# Altium PCB JLink_ARM-OB_Pcb.PcbDoc
Units mil, origin at the board's own origin, x right, y up, seen from the top; angles counter-clockwise.
Board outline 944.88 x 472.44 mil, 2 copper layers (Top Layer, Bottom Layer); 31 components, 27 nets, 123 pads, 58 vias.
Unrouted connection lines stored in the file: 1.
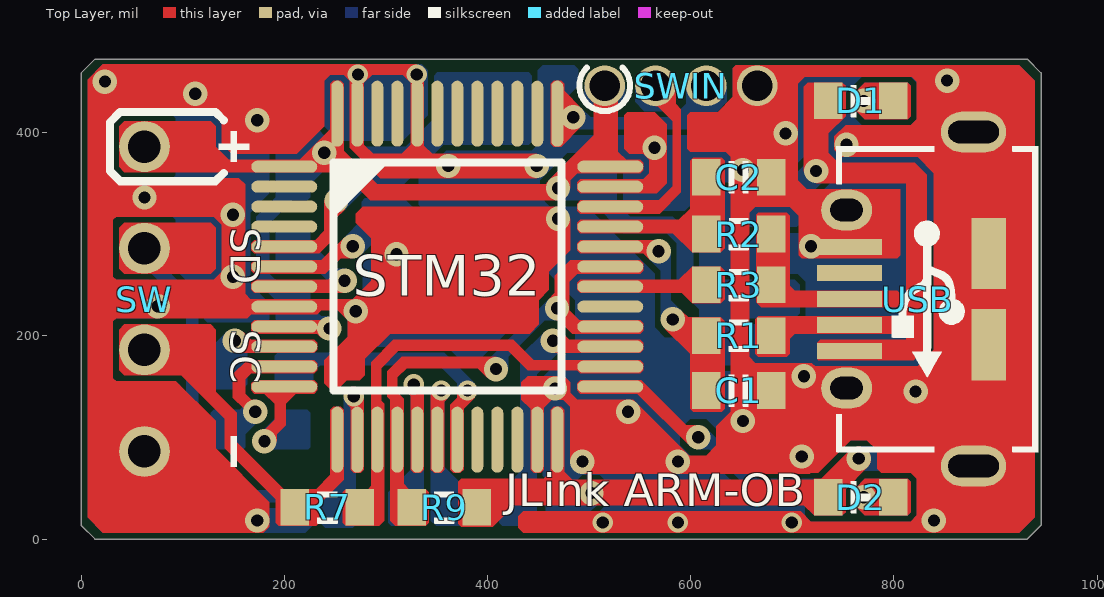
[diagram p0: Top Layer view]
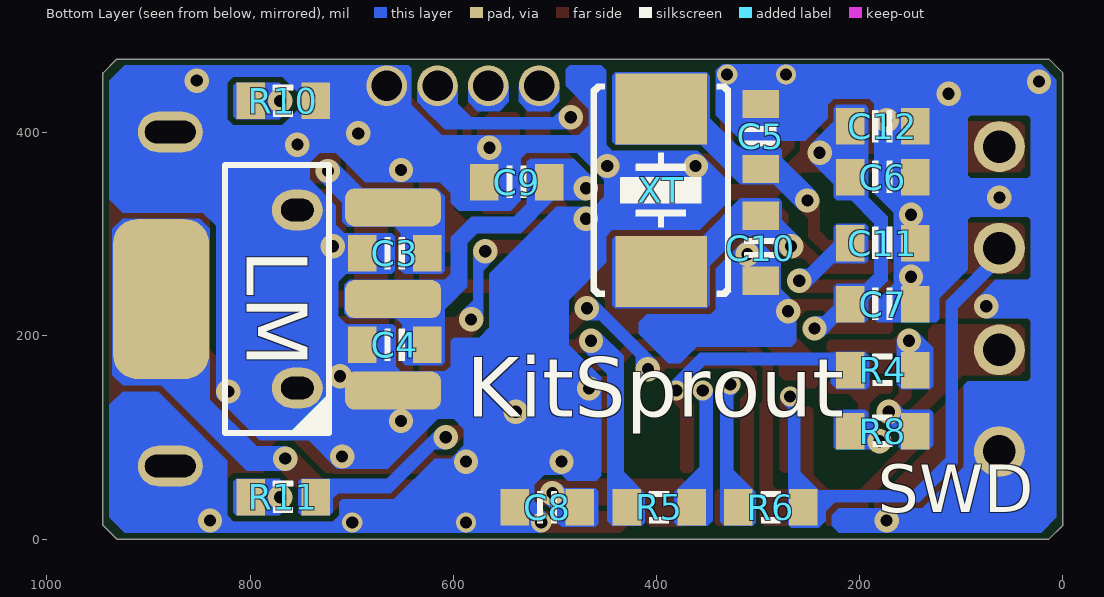
[diagram p1: Bottom Layer view, seen from below]
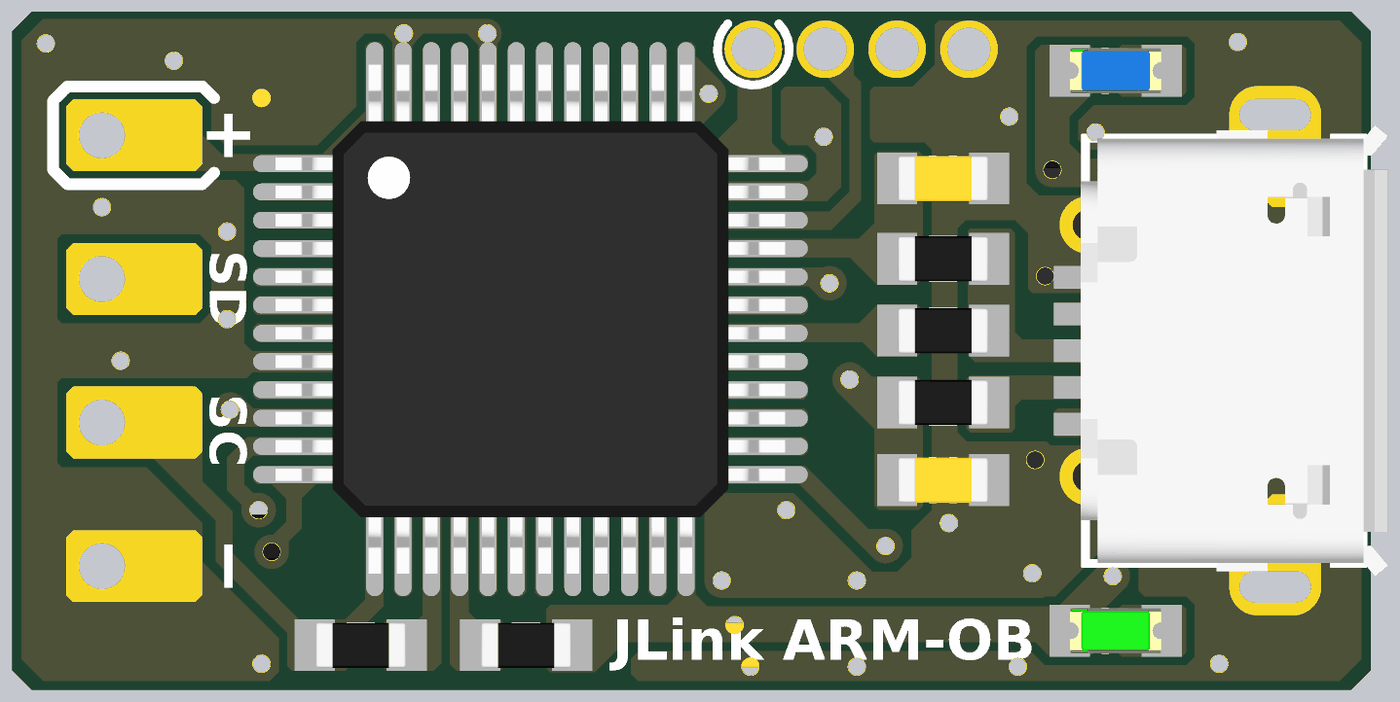
[diagram p2: 3D render of the assembled board from above, using the file's embedded part models]
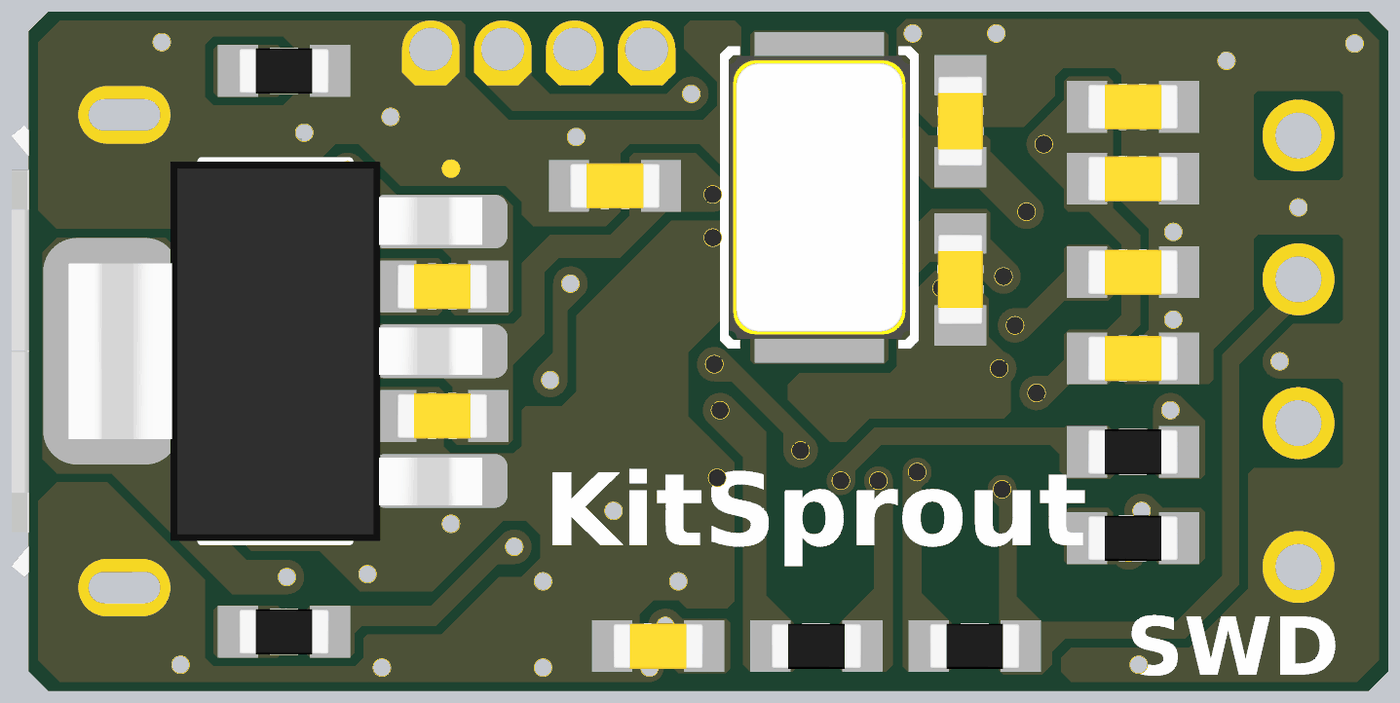
[diagram p3: 3D render of the assembled board from below, using the file's embedded part models]

## Layer stack, top to bottom
Top Solder: solder mask 0.4, Solder Resist, Dk 3.5
Top Layer: signal copper 1.4
Dielectric1: dielectric 12.6, FR-4, Dk 4.8
Bottom Layer: signal copper 1.4
Bottom Solder: solder mask 0.4, Solder Resist, Dk 3.5

## Board outline
0,13.66 13.66,0 931.22,0 944.88,13.66 944.88,458.78 931.22,472.44 13.66,472.44 0,458.78

## Design rules (kind name [scope] priority, off if disabled: settings)
Clearance ClearancePolygon [InPolygon] p1: gap=12 ignorepadtopadclearanceinfootprint=FALSE except(0: Arc-Hole Track-Hole SMDPad-Hole THPad-Hole Via-Hole Fill-Hole Poly-Hole Region-Hole Text-Hole)
Clearance [All] p2: gap=6 ignorepadtopadclearanceinfootprint=FALSE except(0: Arc-Hole Track-Hole SMDPad-Hole THPad-Hole Via-Hole Fill-Hole Poly-Hole Region-Hole Text-Hole)
ComponentClearance [All] p1: gap=0 collisioncheckmode=3 verticalgap=0 showdistances=FALSE
HoleToHoleClearance [All] p1: gap=0 allowstackedmicrovias=TRUE
MinimumSolderMaskSliver [All] p1: minsoldermaskwidth=0
PlaneConnect [All] p1: planeconnectstyle=Direct reliefexpansion=20 reliefentries=4 reliefconductorwidth=20 reliefairgap=10
PolygonConnect [All] p1: connectstyle=Direct reliefconductorwidth=20 reliefentries=4 polygonreliefangle="90 Angle" airgapwidth=10
RoutingVias [All] p1: holewidth=12 width=20 viastyle="Through Hole" minholewidth=12 minwidth=20 maxholewidth=20 maxwidth=50
SilkToSilkClearance [All] p1: silktosilkclearance=0
SilkToSolderMaskClearance SilkscreenOverComponentPads [IsPad] p1: minsilkscreentomaskgap=2 clearancetoexposedcopper=TRUE
SolderMaskExpansion [All] p1: expansion=0 istentingtop=FALSE
Width [All] p1: maxlimit=35 minlimit=6 preferedwidth=10
24 further rules are at their usual default settings.

## Components (designator, comment, footprint, x,y, rotation, side; value= is the part's Value field where it differs from the comment)
C1 "Cap_0603" CAP_0603 647.44,146.22 r180 top locked
C2 "Cap_0603" CAP_0603 647.44,356.22 r180 top locked
C3 "Cap_0603" CAP_0603 657.44,281.22 r180 bottom locked
C4 "Cap_0603" CAP_0603 657.44,191.22 r180 bottom locked
C5 "Cap_0603" CAP_0603 297.44,396.22 r90 bottom locked
C6 "Cap_0603" CAP_0603 177.44,356.22 r180 bottom locked
C7 "Cap_0603" CAP_0603 177.44,231.22 r180 bottom locked
C8 "Cap_0603" CAP_0603 507.44,31.22 r0 bottom locked
C9 "Cap_0603" CAP_0603 537.44,351.22 r0 bottom locked
C10 "Cap_0603" CAP_0603 297.44,286.22 r270 bottom locked
C11 "Cap_0603" CAP_0603 177.44,291.22 r180 bottom locked
C12 "Cap_0603" CAP_0603 177.44,406.22 r180 bottom locked
D1 "LED_0603" LED_0603_BLUE 767.44,431.22 r0 top locked
D2 "LED_0603" LED_0603_GREEN 767.44,41.22 r0 top locked
LM "AMS1117" SOT223 773.44,236.22 r90 bottom locked
R1 "Res_0603" RES_0603 647.44,200.22 r180 top locked
R2 "Res_0603" RES_0603 647.44,300.22 r180 top locked
R3 "Res_0603" RES_0603 647.44,250.22 r180 top locked
R4 "Res_0603" RES_0603 177.44,166.22 r180 bottom locked
R5 "Res_0603" RES_0603 397.44,31.22 r0 bottom locked
R6 "Res_0603" RES_0603 287.44,31.22 r0 bottom locked
R7 "Res_0603" RES_0603 242.44,31.22 r0 top locked
R8 "Res_0603" RES_0603 177.44,106.22 r180 bottom locked
R9 "Res_0603" RES_0603 357.44,31.22 r0 top locked
R10 "Res_0603" RES_0603 767.44,431.22 r0 bottom locked
R11 "Res_0603" RES_0603 767.44,41.22 r0 bottom locked
STM32 "STM32F103C" STM32_QFP48 360.44,258.22 r0 top locked
SW "HDR1X4_90_2.54" HDR1X4_90_2.54 62.44,86.22 r90 top
SWIN "Pad1X4_1.27_SWD" Pad1X4_1.27 515.44,446.22 r0 top locked
USB "USB_Micro" USB_Micro-AB 881.44,236.22 r270 top locked
XT "XTAL_5032_2P" XT_5032_2 395.44,343.22 r90 bottom locked

## Footprints (in the part's own frame and the unit in brackets; to place one, negate y for a bottom-side part, rotate by r counter-clockwise, add the part's x,y. Pads: shape width x height; smd on the part's side, far side on the other; paste and mask are expansions set on the pad)
CAP_0603 [mil]
  rect 28x36 smd: 1(-32,0) 2(32,0)
  silkscreen extent -10,-16 10,16, body extent -31,-16 32,16, height 36
HDR1X4_90_2.54 [mil] "Connector; Header; 4 Position"
  round 50 hole 32: 1(0,0) 2(100,0) 3(200,0) 4(300,0)
LED_0603_BLUE [mil]
  rect 28x36 smd: 1(-32,0) 2(32,0)
  silkscreen extent -10,-16 10,16, body extent -32,-16 32,16, height 24
LED_0603_GREEN [mil]
  rect 28x36 smd: 1(-32,0) 2(32,0)
  silkscreen extent -10,-16 10,16, body extent -32,-16 32,16, height 24
Pad1X4_1.27 [mil] "Connector; Header; 2 Position"
  round 40 hole 30 mask+0: 1(0,0) 2(50,0) 3(100,0) 4(150,0)
  Bottom Layer region: 130,0 130,-16 139,-25 161,-25 170,-16 170,0
  Bottom Layer region: 80,0 80,-16 89,-25 111,-25 120,-16 120,0
  Bottom Layer region: 30,0 30,-16 39,-25 61,-25 70,-16 70,0
  Bottom Layer region: -20,0 -20,-16 -11,-25 11,-25 20,-16 20,0
RES_0603 [mil]
  rect 28x36 smd: 1(-32,0) 2(32,0)
  silkscreen extent -10,-16 10,16, body extent -31,-16 32,16, height 20
SOT223 [mm] "SOT223, 4-Leads, Body 6.7x7.3mm (max), Pitch 2.29mm, IPC Medium Density"
  rrect50% 0.95x2.4 smd: 1(-2.29,-2.9) 2(0,-2.9) 3(2.29,-2.9)
  rrect50% 4x2.4 smd: 4(0,2.9)
  silkscreen extent -3.35,-1.3 3.35,1.3, body extent -3.35,-3.65 3.35,3.65, height 1.8
STM32_QFP48 [mm] "TSQFP, 48-Leads, Body 9.0x9.0mm (max), Pitch 0.50mm, IPC Medium Density"
  oval 1.65x0.3 smd: 1(-4.075,2.75) 2(-4.075,2.25) 3(-4.075,1.75) 4(-4.075,1.25) 5(-4.075,0.75) 6(-4.075,0.25) 7(-4.075,-0.25) 8(-4.075,-0.75) 9(-4.075,-1.25) 10(-4.075,-1.75) 11(-4.075,-2.25) 12(-4.075,-2.75) 25(4.075,-2.75) 26(4.075,-2.25) 27(4.075,-1.75) 28(4.075,-1.25) 29(4.075,-0.75) 30(4.075,-0.25) 31(4.075,0.25) 32(4.075,0.75) 33(4.075,1.25) 34(4.075,1.75) 35(4.075,2.25) 36(4.075,2.75)
  oval 0.3x1.65 smd: 13(-2.75,-4.075) 14(-2.25,-4.075) 15(-1.75,-4.075) 16(-1.25,-4.075) 17(-0.75,-4.075) 18(-0.25,-4.075) 19(0.25,-4.075) 20(0.75,-4.075) 21(1.25,-4.075) 22(1.75,-4.075) 23(2.25,-4.075) 24(2.75,-4.075) 37(2.75,4.075) 38(2.25,4.075) 39(1.75,4.075) 40(1.25,4.075) 41(0.75,4.075) 42(0.25,4.075) 43(-0.25,4.075) 44(-0.75,4.075) 45(-1.25,4.075) 46(-1.75,4.075) 47(-2.25,4.075) 48(-2.75,4.075)
  silkscreen extent -2.85,-2.85 2.85,2.85, body extent -4.5,-4.5 4.5,4.5, height 1.59
USB_Micro-AB [mil]
  rect 15.75x64 smd: 1(51.18,-125) 2(25.59,-125) 3(0,-125) 4(-25.59,-125) 5(-51.18,-125)
  oval 40x64 hole 22 slot 50 at 90 deg mask+0: 5(-164.37,-3) 5(164.37,-3)
  oval 40x50 hole 22 slot 32 at 90 deg mask+0: 5(-87.6,-128) 5(87.6,-128)
  rect 70x34 smd mask+0: 5(-45,12) 5(45,12)
  Top Layer region: -164.37,29 -100,29 -100,-5 -130,-35 -164.37,-35
  Top Layer region: 100,29 164.37,29 164.37,-35 130,-35 100,-5
  silkscreen extent -150,-138 151,61, body extent -157,-138 157,75, height 107
XT_5032_2 [mil]
  rect 70x90 smd: 1(-80,0) 2(80,0)
  silkscreen extent -104,-68 104,68, body extent -98,-63 98,63, height 39

## Part data
C1 C2 C3 C4 C5 C6 C7 C8 C9 C10 C11 C12: "Capacitor"
D1 D2: "LED"
LM: "Power"
R1 R2 R3 R4 R5 R6 R7 R8 R9 R10 R11: "Resistor"
STM32: "MCU"
SW SWIN: "Header"
USB: "USB"
XT: "Crystal Oscillator"

## Via types
v1: diameter 24, hole 12, Top Layer to Bottom Layer, 49 vias
v2: diameter 20, hole 12, Top Layer to Bottom Layer, 9 vias

## Nets (pads, with @x,y where several pads share a name; then routed paths per layer and width w, separated by ;. In a path a pad name is that pad's centre, name@x,y a point inside that pad or via, vN(x,y) a via of type N, cw(c..) or ccw(c..) an arc to the next point about the centre after c; other vN are vias at no path point)
3V3: C4.2 C6.1 C7.1 C8.1 C9.1 C12.1 D2.1 LM.2 LM.4 R9.2 STM32.1 STM32.9 STM32.24 STM32.36 STM32.48 SW.4 SWIN.1 | length 1938.6
  Top Layer w10: SW.4 82.17,366.49 STM32.1 225.71,366.49 v1(239.44,380.22) ; STM32.9 242.65,209.01 v1(244.44,207.22) ; 252.17,379.95 STM32.48 ; R9.2@389.91,29.22 405.91,45.22 729.98,45.22 D2.1@733.98,41.22 ; v1(469.44,345.22) 469.44,353.72 482.99,367.27 520.32,367.27 509.44,378.14
  Top Layer w16: 252.44,377.22 288.44,341.22 v1@469.44,341.22
  Top Layer w24: 516.44,378.14 SWIN.1@516.44,446.22 ; D2.1@730.44,44.22 v1(765.44,79.22)
  Bottom Layer w10: 180.44,311.76 180.44,257.22 203.44,234.22 213.44,234.22 240.44,207.22 v1(244.44,207.22) ; 180.44,312.76 209.91,342.22 209.91,350.22 239.44,379.76 v1(239.44,380.22) 239.44,380.69 C12.1@209.91,410.22 ; v1@465.44,342.22 477.44,354.22 C9.1@505.91,354.22 ; C9.1@506.98,354.22 C9.1@505.91,354.22 ; LM.2@620.44,232.22 595.44,257.22 595.44,291.22 575.44,311.22 538.44,311.22 505.91,343.76 C9.1@505.91,354.22 ; LM.2@620.44,236.22 LM.2 630.44,236.22 629.98,235.76 C4.2@629.98,191.22 ; LM.4@887.62,168.39 LM.4 LM.4@887.62,267.05
  Bottom Layer w24: v1(765.44,79.22) 798.44,79.22 LM.4@887.62,168.39
  other v1: 502.44,45.22
D+: C2.2 R2.2 STM32.33 | length 148.7
  Top Layer w10: STM32.33@520.32,308.21 R2.2@614.98,308.21 ; R2.2@614.98,304.22 R2.2@614.98,308.21 ; C2.2@614.98,358.22 R2.2@614.98,308.21
D-: C1.2 R1.2 STM32.32 | length 206.9
  Top Layer w10: STM32.32@520.32,288.53 v1@562.13,288.53 ; v1@585.44,216.22 605.44,196.22 614.98,196.22 C1.2@614.98,142.22
  Bottom Layer w10: v1(568.44,283.22) 575.44,276.22 575.44,224.22 v1@583.44,216.22
  other v1: 582.44,216.22
GND: C1.1 C2.1 C3.1 C4.1 C5.2 C6.2 C7.2 C8.2 C9.2 C10.2 C11.2 C12.2 LM.1 R10.1 STM32.8 STM32.23 STM32.35 STM32.44 STM32.47 SW.1 SWIN.4 USB.5 | length 3085.6
  Top Layer w8: v1@473,145.22 493.44,124.78 v1@493.44,75.22
  Top Layer w10: SW.1@52.44,86.22 52.44,96.22 12.44,136.22 12.44,438.22 v1(112.44,438.22) ; v1@117.44,438.22 141.44,462.22 v2@270.44,462.22 ; v1@147.44,261.22 147.44,241.22 159.97,228.69 STM32.8 201.54,230.22 290.44,230.22 ; v2@271.44,461.22 271.44,419.07 STM32.47 ; v2@272.36,462.13 324.53,462.13 330.91,455.75 STM32.44 330.91,376.75 340.44,367.22 v1(448.44,367.22) ; STM32.23 449.02,135.8 458.44,145.22 v1@473,145.22
  Top Layer w12: USB.5@725.62,287.4 USB.5@781.13,287.4
  Top Layer w24: SWIN.4@665.44,442.22 665.44,374.69 C2.1@681.91,358.22 ; C1.1@681.91,142.22 699.44,142.22 ; v1(852.44,451.22) 867.44,436.22 867.44,414.59 881.44,400.59 896.44,385.59 896.44,281.22 896.44,191.22 896.44,86.85 USB.5@881.44,71.85
  Bottom Layer w10: v1(112.44,438.22) 142.98,407.69 C7.2@142.98,234.22 ; v2@271.44,461.22 273.94,458.72 v2@274.41,458.72 ; v2(272.44,457.22) 294.98,434.69 C5.2@298.44,434.69 ; v1(361.44,367.22) 366.44,362.22 443.44,362.22 469.44,388.22 611.44,388.22 SWIN.4@665.44,442.22 ; v1@493.44,75.22 520.44,75.22 538.44,57.22 C8.2@538.44,30.69
  Bottom Layer w24: SWIN.4 692.44,446.22 804.44,334.22 804.44,184.73 769.93,150.22 727.44,150.22 717.44,160.22 696.91,180.76 C4.1@696.91,191.22 ; C3.1@696.91,281.22 702.66,281.22 725.44,258.44 725.44,214.56 C4.1@702.1,191.22
  other v1: 173.44,18.22 839.44,18.22 493.44,76.22 587.44,76.22 709.44,81.22 651.44,116.22 538.44,125.22 821.44,145.22 466.44,148.22 711.44,160.22 270.44,224.22 75.44,229.22 149.44,258.22 310.44,280.22 718.44,288.22 469.44,315.22 149.44,319.22 62.44,336.22 651.44,363.22 564.44,385.22 753.44,388.22 693.44,399.22 173.44,412.22 23.44,450.22
  other v2: 513.44,16.22 587.44,16.22 699.44,16.22 330.44,457.22
JTCK: STM32.37 SWIN.3 | length 155.9
  Top Layer w10: STM32.37@468.15,419.43 474.36,413.22 v1@486.44,413.22
  Bottom Layer w8: 494.44,408.22 581.44,408.22 SWIN.3@615.44,442.22
  other v1: 484.44,415.22
JTMS: STM32.34 SWIN.2 | length 179
  Top Layer w8: STM32.34@520.32,327.9 569.12,327.9 586.44,345.22 586.44,414.22 565.44,435.22 SWIN.2@565.44,442.22
LED: R11.1 STM32.25 | length 261.2
  Top Layer w10: STM32.25@520.87,149.73 549.43,149.73 596.94,102.22 v1@611.44,102.22
  Bottom Layer w12: v1(607.44,100.22) 615.44,100.22 663.44,52.22 722.98,52.22 R11.1@733.98,41.22
NetD1_2: D1.2 R10.2
  other v1: 770.44,431.22
NetD2_2: D2.2 R11.2
  other v1: 770.44,41.22
NetR1_1: R1.1 USB.2 | length 95.5
  Top Layer w6: R1.1@681.91,196.22 696.32,210.63 USB.2@771.44,210.63
NetR2_1: R2.1 R3.1 USB.3 | length 95.3
  Top Layer w6: R3.1@681.91,250.22 695.91,236.22 USB.3@771.44,236.22
RD+: R3.2 STM32.30 | length 93.6
  Top Layer w10: STM32.30@520.32,249.16 R3.2@613.91,249.16
RST: C11.1 STM32.7 | length 125.5
  Top Layer w10: STM32.7 253.6,248.38 v1(259.44,254.22)
  Bottom Layer w10: C11.1@209.91,288.22 219.44,288.22 253.44,254.22 v1(259.44,254.22)
TCK_I: R7.1 STM32.13 SW.2 | length 339.3
  Top Layer w12: SW.2 115.44,186.22 126.44,175.22 126.44,142.22 147.44,121.22 147.44,92.22 208.67,30.99 221.75,30.99 252.17,61.42 STM32.13
TCK_O: R7.2 STM32.15 STM32.26 | length 350.2
  Top Layer w8: STM32.15 STM32.15@291.54,128.98
  Top Layer w10: STM32.15 291.54,133.12 290.44,134.22 290.44,170.22 310.44,190.22 423.44,190.22 442.44,171.22 STM32.26@520.44,171.22
TDI_I: R5.1 STM32.18 | length 105.1
  Bottom Layer w12: 350.44,42.76 350.44,142.22 v2(354.44,146.22)
TDI_O: R5.2 STM32.27 | length 236.3
  Top Layer w12: v1(464.44,195.22) v1@470.34,189.32 ; v1@469.91,189.22 STM32.27@520.44,189.22
  Bottom Layer w12: R5.2@429.91,29.22 R5.2@440.44,39.76 ; R5.2@441.44,39.76 441.44,178.22 v1@458.44,195.22
TDO_I: R9.1 STM32.16 STM32.28 STM32.31 | length 393.2
  Top Layer w10: 306.44,143.22 306.44,162.22 316.44,172.22 317.44,172.22 318.44,173.22 393.44,173.22 v1@399.44,167.22 ; 306.77,141.89 311.23,137.43 STM32.16
  Top Layer w12: STM32.28@520.32,208.79 485.88,208.79 473.44,221.22 473.44,255.22 486.06,267.84 STM32.31@520.32,267.84
  Bottom Layer w10: v1(408.44,167.22) 408.44,176.22 459.44,227.22 v1(468.44,227.22)
TMS_I: R6.1 STM32.14 SW.3 | length 390.9
  Bottom Layer w12: SW.3 62.44,277.22 109.44,230.22 109.44,77.22 144.44,42.22 238.98,42.22 R6.1@251.98,29.22
  other v2: 268.44,140.22
TMS_O: R6.2 STM32.17 | length 111.5
  Bottom Layer w12: R6.2@331.44,39.76 v2@331.44,151.22
  other v2: 327.44,152.22
TRES_I: R8.1 STM32.12 | length 96.9
  Top Layer w10: v1(180.44,96.22) 180.44,99.22 196.01,114.79 STM32.12@196.01,149.95
  Bottom Layer w10: v1@179.44,95.22 194.44,110.22 R8.1@209.91,110.22
TRES_O: R8.2 STM32.11 | length 127.2
  Top Layer w10: v1@171.94,124.72 156.44,140.22 156.44,162.22 163.86,169.64 STM32.11
  Bottom Layer w10: R8.2@142.98,110.22 158.44,110.22 v1@173.44,125.22
  other v1: 171.44,125.22
TRST_I: R4.1 STM32.19 | length 191.8
  Bottom Layer w12: R4.1@209.91,164.22 222.91,177.22 354.55,177.22 380.44,151.33 v2(380.44,146.22)
TRST_O: R4.2 STM32.10 | length 87.9
  Top Layer w12: v1@150.44,196.22 157.34,189.32 STM32.10
  Bottom Layer w12: R4.2@142.98,164.22 151.44,172.69 v1@151.44,196.22
  other v1: 151.44,195.22
VCC: C3.2 D1.1 LM.3 USB.1 | length 521.7
  Top Layer w15: v1@731.44,359.22 820.44,359.22 820.44,190.22 815.26,185.04 USB.1@781.13,185.04
  Top Layer w24: v1@723.44,367.22 723.44,420.69 D1.1@733.98,431.22
  Bottom Layer w24: C3.2@629.98,281.22 629.98,326.38 LM.3 LM.3@686.6,326.38 ; LM.3@686.6,325.38 v1(723.44,362.22)
X1: C5.1 STM32.5 XT.2 | length 155.8
  Top Layer w10: STM32.5 231.63,287.75 244.44,300.56 244.44,326.22 v1(251.44,333.22)
  Bottom Layer w10: v1@258.44,335.22 290.98,367.76 C5.1@298.44,367.76
  Bottom Layer w12: XT.2@378.44,426.22 XT.2@395.44,426.22
X2: C10.1 STM32.6 XT.1 | length 125.7
  Top Layer w10: STM32.6 238.28,268.06 v1@258.44,288.22
  Bottom Layer w10: v1@267.44,290.22 271.98,290.22 C10.1@298.44,316.69
  Bottom Layer w12: XT.1@378.44,260.22 XT.1@395.44,260.22
  other v1: 267.44,288.22
pads on no net: STM32.2 STM32.3 STM32.4 STM32.20 STM32.21 STM32.22 STM32.29 STM32.38 STM32.39 STM32.40 STM32.41 STM32.42 STM32.43 STM32.45 STM32.46 USB.4

## Other copper
Top Layer:
  region net TMS_O: 337.44,68.22 334.44,65.22 327.44,65.22 324.44,68.22 324.44,141.22 320.44,145.22 327.44,152.22 337.44,152.22
  region net TDI_I: 357.44,68.22 354.44,65.22 347.44,65.22 344.44,68.22 344.44,146.22 354.44,146.22 361.44,139.22 357.44,135.22
  region net NetD1_2: 813.44,449.22 816.44,446.22 816.44,416.22 813.44,413.22 771.44,413.22 761.94,422.72 770.44,431.22 761.94,439.72 771.44,449.22
  region net NetD2_2: 813.44,59.22 816.44,56.22 816.44,26.22 813.44,23.22 771.44,23.22 761.94,32.72 770.44,41.22 761.94,49.72 771.44,59.22
  region net NetR2_1: 803.44,244.22 806.44,241.22 806.44,231.22 803.44,228.22 669.44,228.22 664.44,233.22 664.44,319.22 666.44,321.22 694.44,321.22 697.44,318.22 697.44,249.22 702.44,244.22
  region net VCC: 735.44,380.22 735.44,399.22 752.44,416.22 752.44,446.22 749.44,449.22 715.44,449.22 711.44,445.22 711.44,362.22 723.44,362.22 723.44,350.22 812.44,350.22 812.44,196.22 727.44,196.22 724.44,193.22 724.44,177.22 725.44,176.22 819.73,176.22 832.44,188.94 832.44,358.5 820.73,370.22 745.44,370.22
  region net D-: 633.44,214.22 633.44,128.22 630.44,125.22 602.44,125.22 599.44,128.22 599.44,182.22 574.44,207.22 591.44,224.22 597.44,218.22 629.44,218.22
  region net RD+: 601.44,268.22 629.44,268.22 633.44,264.22 633.44,236.22 629.44,232.22 601.44,232.22 591.44,242.22 491.44,242.22 488.44,245.22 488.44,252.22 491.44,255.22 588.44,255.22
  region net D-: 568.44,294.22 568.44,283.22 559.94,274.72 553.44,281.22 491.44,281.22 488.44,284.22 488.44,291.22 491.44,294.22
  region net D+: 588.44,314.22 599.44,325.22 599.44,372.22 602.44,375.22 630.44,375.22 633.44,372.22 633.44,286.22 629.44,282.22 601.44,282.22 582.44,301.22 491.44,301.22 488.44,304.22 488.44,311.22 491.44,314.22
  region net JTMS: 568.44,333.22 582.44,347.22 582.44,411.22 567.44,426.22 565.44,426.22 565.44,446.22 585.44,446.22 585.44,428.22 590.44,423.22 590.44,341.22 569.44,320.22 491.44,320.22 488.44,323.22 488.44,330.22 491.44,333.22
  region net GND: 553.44,354.22 559.44,360.22 559.44,373.22 553.44,379.22 539.44,379.22 534.44,384.22 534.44,417.22 537.44,420.22 564.44,420.22 576.44,408.22 576.44,350.22 566.44,340.22 491.44,340.22 488.44,343.22 488.44,351.22 491.44,354.22
  region net 3V3: 553.44,370.22 553.44,363.22 550.44,360.22 488.44,360.22 481.44,353.22 481.44,345.22 469.44,345.22 469.44,333.22 284.44,333.22 256.44,361.22 62.44,361.22 62.44,386.22 132.44,386.22 145.44,373.22 215.44,373.22 245.44,403.22 245.44,448.22 248.44,451.22 255.44,451.22 258.44,448.22 258.44,382.22 291.44,349.22 457.44,349.22 460.94,353.72 504.44,397.22 504.44,429.22 501.44,432.22 515.94,446.72 529.94,432.72 528.44,431.22 528.44,381.22 536.44,373.22 550.44,373.22
  region net TDO_I: 550.44,215.22 553.44,212.22 553.44,205.22 550.44,202.22 483.44,202.22 470.44,215.22 468.44,215.22 468.44,227.22 459.94,235.72 466.44,242.22 466.44,259.22 481.44,274.22 550.44,274.22 553.44,271.22 553.44,264.22 550.44,261.22 488.44,261.22 480.44,253.22 480.44,225.22 490.44,215.22
  region net LED: 551.44,156.22 595.44,112.22 607.44,112.22 607.44,100.22 598.94,91.72 547.44,143.22 491.44,143.22 488.44,146.22 488.44,153.22 491.44,156.22
  region net JTCK: 462.44,448.22 465.44,451.22 472.44,451.22 475.44,448.22 475.44,441.22 492.94,423.72 484.44,415.22 492.94,406.72 472.44,386.22 465.44,386.22 462.44,389.22
  region net GND: 264.44,451.22 258.44,457.22 245.44,457.22 239.44,451.22 239.44,406.22 212.44,379.22 148.44,379.22 138.44,389.22 138.44,409.22 130.44,417.22 34.44,417.22 31.44,414.22 31.44,358.22 34.44,355.22 155.44,355.22 161.44,349.22 161.44,286.22 138.44,286.22 138.44,309.22 130.44,317.22 34.44,317.22 31.44,314.22 31.44,258.22 34.44,255.22 130.44,255.22 138.44,263.22 138.44,286.22 161.44,286.22 161.44,241.22 166.44,236.22 267.44,236.22 285.44,254.22 285.44,296.22 270.44,311.22 270.44,320.22 277.44,327.22 469.44,327.22 469.44,315.22 481.44,315.22 481.44,284.22 460.44,263.22 460.44,245.22 450.44,235.22 450.44,211.22 441.44,202.22 304.44,202.22 279.44,177.22 279.44,161.22 274.44,156.22 261.44,156.22 253.44,148.22 244.44,148.22 239.44,153.22 239.44,176.22 262.44,199.22 262.44,215.22 252.44,225.22 236.44,225.22 232.44,221.22 167.44,221.22 163.44,217.22 34.44,217.22 31.44,214.22 31.44,158.22 34.44,155.22 93.44,155.22 132.44,116.22 132.44,89.22 185.44,36.22 185.44,12.22 179.44,6.22 21.44,6.22 6.44,21.22 6.44,216.22 6.44,235.22 6.44,452.22 21.44,467.22 330.44,467.22 330.44,457.22 337.44,450.22 337.44,387.22 345.44,379.22 448.44,379.22 448.44,355.22 294.44,355.22 264.44,385.22 264.44,388.22 278.44,388.22 287.44,379.22 315.44,379.22 324.44,388.22 324.44,449.22 316.44,457.22 286.44,457.22 278.44,449.22 278.44,388.22 264.44,388.22
  region net 3V3: 475.44,66.22 483.44,58.22 720.44,58.22 721.44,59.22 728.44,59.22 756.94,87.72 773.94,70.72 752.44,49.22 752.44,26.22 749.44,23.22 721.44,23.22 711.44,33.22 426.44,33.22 405.44,12.22 374.44,12.22 371.44,15.22 371.44,56.22 374.44,59.22 455.44,59.22 462.44,66.22 462.44,127.22 465.44,130.22 472.44,130.22 475.44,127.22
  region net TRST_I: 376.44,68.22 373.44,65.22 366.44,65.22 363.44,68.22 363.44,132.22 370.44,139.22 370.44,146.22 380.44,146.22 387.44,139.22 376.44,128.22
  region net TDO_I: 317.44,54.22 322.44,49.22 339.44,49.22 342.44,46.22 342.44,16.22 339.44,13.22 309.44,13.22 304.44,18.22 304.44,137.22 301.44,140.22 301.44,165.22 315.44,179.22 408.44,179.22 408.44,167.22 399.94,158.72 390.44,168.22 320.44,168.22 311.44,159.22 311.44,144.22 317.44,138.22
  region net TCK_O: 298.44,18.22 293.44,13.22 260.44,13.22 257.44,16.22 257.44,46.22 260.44,49.22 282.44,49.22 285.44,52.22 285.44,174.22 307.44,196.22 425.44,196.22 445.44,176.22 550.44,176.22 553.44,173.22 553.44,166.22 550.44,163.22 491.44,163.22 488.44,166.22 439.44,166.22 420.44,185.22 312.44,185.22 295.44,168.22 295.44,136.22 298.44,133.22
  region net TCK_I: 258.44,58.22 234.44,34.22 234.44,16.22 231.44,13.22 194.44,13.22 191.44,16.22 191.44,39.22 141.44,89.22 141.44,118.22 98.44,161.22 42.44,161.22 37.44,166.22 37.44,206.22 42.44,211.22 127.44,211.22 132.44,206.22 132.44,145.22 153.44,124.22 153.44,95.22 199.44,49.22 231.44,49.22 245.44,63.22 245.44,127.22 248.44,130.22 255.44,130.22 258.44,127.22
  region net X1: 170.44,281.22 167.44,284.22 167.44,291.22 170.44,294.22 230.44,294.22 239.44,303.22 239.44,333.22 251.44,333.22 259.94,324.72 250.44,315.22 250.44,297.22 234.44,281.22
  region net X2: 170.44,261.22 167.44,264.22 167.44,271.22 170.44,274.22 236.44,274.22 258.94,296.72 267.44,288.22 267.44,276.22 255.44,276.22 240.44,261.22
  region net RST: 170.44,242.22 167.44,245.22 167.44,252.22 170.44,255.22 243.44,255.22 250.94,262.72 259.44,254.22 259.44,242.22
  region net 3V3: 170.44,202.22 167.44,205.22 167.44,212.22 170.44,215.22 244.44,215.22 244.44,207.22 235.94,198.72 232.44,202.22
  region net TRST_O: 151.44,183.22 151.44,195.22 159.94,203.72 167.44,196.22 229.44,196.22 232.44,193.22 232.44,186.22 229.44,183.22
  region net TRES_O: 167.44,163.22 161.44,157.22 161.44,143.22 167.44,137.22 172.44,137.22 172.44,125.22 160.44,125.22 160.44,128.22 149.44,139.22 149.44,162.22 163.44,176.22 229.44,176.22 232.44,173.22 232.44,166.22 229.44,163.22
  region net TRES_I: 170.44,143.22 167.44,146.22 167.44,153.22 170.44,156.22 229.44,156.22 232.44,153.22 232.44,146.22 229.44,143.22 211.44,143.22 201.44,133.22 201.44,112.22 192.44,103.22 192.44,96.22 180.44,96.22 180.44,107.22 190.44,117.22 190.44,133.22 180.44,143.22
  region net TDI_O: 464.44,183.22 464.44,195.22 472.94,203.72 480.44,196.22 550.44,196.22 553.44,193.22 553.44,186.22 550.44,183.22
  region net TMS_I: 278.44,68.22 275.44,65.22 268.44,65.22 265.44,68.22 265.44,129.22 261.44,133.22 268.44,140.22 278.44,140.22
  region net NetR1_1: 803.44,219.22 806.44,216.22 806.44,205.22 803.44,202.22 702.44,202.22 697.44,197.22 697.44,182.22 694.44,179.22 666.44,179.22 663.44,182.22 663.44,216.22 666.44,219.22
  region net GND: 626.44,420.22 599.44,420.22 596.44,417.22 596.44,384.22 599.44,381.22 634.44,381.22 639.44,376.22 639.44,125.22 625.44,111.22 625.44,92.22 615.44,82.22 598.44,82.22 543.44,137.22 488.44,137.22 481.44,144.22 481.44,154.22 475.44,160.22 439.44,160.22 433.44,154.22 433.44,137.22 442.44,128.22 442.44,68.22 445.44,65.22 452.44,65.22 455.44,68.22 455.44,129.22 463.44,137.22 474.44,137.22 481.44,130.22 481.44,75.22 493.44,75.22 493.44,64.22 717.44,64.22 718.44,65.22 725.44,65.22 757.44,97.22 773.44,97.22 783.44,87.22 783.44,69.22 787.44,65.22 816.44,65.22 822.44,59.22 822.44,23.22 816.44,17.22 718.44,17.22 708.44,27.22 435.44,27.22 430.44,22.22 430.44,11.22 435.44,6.22 923.44,6.22 938.44,21.22 938.44,451.22 923.44,466.22 822.44,466.22 822.44,413.22 816.44,407.22 752.44,407.22 741.44,396.22 741.44,383.22 748.44,376.22 823.44,376.22 839.44,360.22 839.44,186.22 823.44,170.22 722.44,170.22 719.44,173.22 663.44,173.22 657.44,179.22 657.44,321.22 663.44,327.22 697.44,327.22 706.44,318.22 706.44,279.22 709.44,276.22 803.44,276.22 806.44,279.22 806.44,344.22 714.44,344.22 705.44,353.22 705.44,448.22 712.44,455.22 817.44,455.22 822.44,450.22 822.44,466.22 644.44,466.22 641.46,463.24 641.44,463.24 641.44,435.22
  region net 3V3: 42.44,411.22 127.44,411.22 132.44,406.22 132.44,366.22 127.44,361.22 42.44,361.22 37.44,366.22 37.44,406.22
  region net TMS_I: 42.44,311.22 127.44,311.22 132.44,306.22 132.44,266.22 127.44,261.22 42.44,261.22 37.44,266.22 37.44,306.22
Bottom Layer:
  region net TDI_O: 448.44,18.22 443.44,13.22 414.44,13.22 411.44,16.22 411.44,45.22 432.44,66.22 432.44,180.22 455.94,203.72 472.94,186.72 448.44,162.22
  region net 3V3: 460.44,50.22 490.44,50.22 493.94,53.72 510.94,36.72 497.44,23.22 497.44,16.22 493.44,12.22 460.44,12.22 457.44,15.22 457.44,47.22
  region net LED: 607.44,100.22 615.94,108.72 665.44,59.22 749.44,59.22 752.44,56.22 752.44,26.22 749.44,23.22 721.44,23.22 718.44,26.22 718.44,40.22 713.44,45.22 661.44,45.22 618.44,88.22 607.44,88.22
  region net TDO_I: 408.44,167.22 399.94,175.72 459.94,235.72 468.44,227.22 468.44,215.22 456.44,215.22 420.44,179.22 420.44,167.22
  region net D-: 583.44,216.22 570.44,216.22 570.44,264.22 559.94,274.72 568.44,283.22 580.44,283.22 580.44,235.22 591.44,224.22
  region net TMS_I: 270.44,14.22 267.44,11.22 240.44,11.22 233.44,18.22 233.44,27.22 224.44,36.22 141.44,36.22 103.44,74.22 103.44,227.22 53.94,276.72 63.44,286.22 115.44,234.22 115.44,80.22 147.44,48.22 240.44,48.22 258.44,66.22 258.44,140.22 268.44,140.22 275.44,133.22 270.44,128.22
  region net TDI_I: 357.44,71.22 382.44,46.22 382.44,16.22 379.44,13.22 349.44,13.22 344.44,18.22 344.44,146.22 354.44,146.22 361.44,139.22 357.44,135.22
  region net TMS_O: 337.44,17.22 333.44,13.22 305.44,13.22 302.44,16.22 302.44,46.22 324.44,68.22 324.44,141.22 320.44,145.22 327.44,152.22 337.44,152.22
  region net JTCK: 626.44,421.22 608.44,403.22 484.44,403.22 484.44,415.22 492.94,423.72 501.44,415.22 582.44,415.22 595.44,428.22 595.44,430.22 604.44,421.22
  region net NetD2_2: 813.44,59.22 816.44,56.22 816.44,26.22 813.44,23.22 771.44,23.22 761.94,32.72 770.44,41.22 761.94,49.72 771.44,59.22
  region net VCC: 611.44,261.22 608.44,264.22 608.44,337.22 616.44,345.22 689.44,345.22 715.44,371.22 732.44,354.22 709.44,331.22 709.44,312.22 704.44,307.22 657.44,307.22 651.44,301.22 651.44,264.22 648.44,261.22
  region net GND: 657.44,298.22 660.44,301.22 707.44,301.22 715.44,309.22 715.44,328.22 741.44,354.22 741.44,370.22 731.44,380.22 715.44,380.22 686.44,351.22 613.44,351.22 602.44,340.22 602.44,331.22 594.44,323.22 543.44,323.22 533.44,333.22 533.44,374.22 527.44,380.22 478.44,380.22 451.44,353.22 451.44,337.22 461.44,327.22 438.44,304.22 357.44,304.22 332.44,329.22 332.44,355.22 359.44,382.22 443.44,382.22 449.44,388.22 449.44,461.22 454.44,466.22 485.44,466.22 489.44,462.22 489.44,446.22 466.44,423.22 466.44,407.22 476.44,397.22 611.44,397.22 641.44,427.22 641.44,463.22 644.44,466.22 752.44,466.22 752.44,423.22 768.44,407.22 816.44,407.22 822.44,413.22 822.44,449.22 816.44,455.22 768.44,455.22 752.44,439.22 752.44,466.22 923.44,466.22 938.44,451.22 938.44,334.22 925.44,321.22 846.44,321.22 833.44,308.22 833.44,140.22 790.44,97.22 742.44,97.22 714.44,69.22 664.44,69.22 615.44,118.22 599.44,118.22 589.44,108.22 589.44,92.22 602.44,79.22 618.44,79.22 658.44,39.22 709.44,39.22 712.44,36.22 712.44,23.22 718.44,17.22 816.44,17.22 822.44,23.22 822.44,77.22 890.44,145.22 925.44,145.22 938.44,132.22 938.44,21.22 923.44,6.22 513.44,6.22 513.44,16.22 506.44,23.22 520.44,37.22 520.44,53.22 510.44,63.22 493.44,63.22 487.44,57.22 459.44,57.22 454.44,62.22 454.44,159.22 486.44,191.22 486.44,235.22 449.44,272.22 449.44,298.22 443.44,304.22 438.44,304.22 461.44,327.22 498.44,327.22 564.44,261.22 564.44,208.22 574.44,198.22 599.44,198.22 602.44,195.22 602.44,170.02 608.44,165.22 651.44,165.22 656.44,170.22 656.44,208.22 659.44,211.22 705.44,211.22 713.44,219.22 713.44,253.22 705.44,261.22 660.44,261.22 657.44,264.22
  region net NetD1_2: 813.44,449.22 816.44,446.22 816.44,416.22 813.44,413.22 771.44,413.22 761.94,422.72 770.44,431.22 761.94,439.72 771.44,449.22
  region net 3V3: 765.44,91.22 793.44,91.22 839.44,137.22 839.44,305.22 849.44,315.22 925.44,315.22 935.44,305.22 935.44,161.22 925.44,151.22 887.44,151.22 803.44,67.22 765.44,67.22
  region net X1: 440.44,459.22 443.44,456.22 443.44,391.22 440.44,388.22 356.44,388.22 317.44,349.22 284.44,349.22 259.94,324.72 242.94,341.72 276.44,375.22 276.44,383.22 279.44,386.22 319.44,386.22 347.44,414.22 347.44,456.22 350.44,459.22
  region net X2: 440.44,227.22 443.44,230.22 443.44,295.22 440.44,298.22 354.44,298.22 317.44,335.22 279.44,335.22 276.44,332.22 276.44,314.22 259.44,297.22 276.44,280.22 294.44,298.22 318.44,298.22 347.44,269.22 347.44,230.22 350.44,227.22
  region net 3V3: 225.44,336.22 225.44,349.22 247.94,371.72 239.44,380.22 247.94,388.72 225.44,411.22 225.44,424.22 222.44,427.22 194.44,427.22 191.44,424.22 191.44,336.22 172.44,317.22 172.44,254.22 191.44,235.22 191.44,216.22 194.44,213.22 221.44,213.22 235.94,198.72 244.44,207.22 244.44,219.22 236.44,219.22 225.44,230.22 225.44,248.22 222.44,251.22 195.44,251.22 185.44,261.22 185.44,310.22 208.44,333.22 222.44,333.22
  region net RST: 191.44,307.22 194.44,310.22 222.44,310.22 225.44,307.22 225.44,292.22 251.44,266.22 259.44,266.22 259.44,254.22 250.94,245.72 225.44,271.22 194.44,271.22 191.44,274.22
  region net GND: 315.44,292.22 297.44,292.22 277.44,272.22 277.44,246.22 265.44,234.22 270.44,224.22 262.44,217.22 262.44,194.22 267.44,189.22 360.44,189.22 376.44,173.22 388.44,173.22 417.44,202.22 417.44,213.22 409.44,221.22 346.44,221.22 341.44,226.22 341.44,266.22
  region net GND: 335.44,467.22 341.44,461.22 341.44,417.22 316.44,392.22 253.44,392.22 231.44,414.22 231.44,427.22 225.44,433.22 190.44,433.22 185.44,428.22 185.44,340.22 166.44,321.22 166.44,251.22 185.44,232.22 185.44,216.22 182.44,213.22 124.44,213.22 121.44,216.22 121.44,237.22 93.44,265.22 93.44,414.22 90.44,417.22 34.44,417.22 31.44,414.22 31.44,358.22 34.44,355.22 90.44,355.22 93.44,358.22 93.44,314.22 90.44,317.22 34.44,317.22 31.44,314.22 31.44,258.22 34.44,255.22 66.44,255.22 83.94,237.72 75.44,229.22 75.44,217.22 34.44,217.22 31.44,214.22 31.44,158.22 34.44,155.22 93.44,155.22 97.44,151.22 97.44,71.22 138.44,30.22 220.44,30.22 227.44,23.22 227.44,13.22 220.44,6.22 21.44,6.22 6.44,21.22 6.44,452.22 21.44,467.22
  region net TRST_O: 143.44,204.22 127.44,188.22 127.44,150.22 130.44,147.22 158.44,147.22 163.44,152.22 163.44,196.22 151.44,196.22
  region net TRES_O: 171.44,125.22 162.94,133.72 156.44,127.22 130.44,127.22 127.44,124.22 127.44,92.22 131.44,88.22 159.44,88.22 161.44,90.22 161.44,103.22 171.44,113.22
  region net TRES_I: 180.44,96.22 180.44,108.22 191.44,119.22 191.44,124.22 194.44,127.22 222.44,127.22 225.44,124.22 225.44,90.22 223.44,88.22 189.44,88.22 188.94,87.72
  region net TRST_I: 225.44,183.22 224.44,184.22 194.44,184.22 190.44,180.22 190.44,150.22 193.44,147.22 222.44,147.22 228.44,153.22 228.44,164.22 235.44,171.22 352.44,171.22 370.44,153.22 370.44,145.22 379.44,145.22 387.44,153.22 357.44,183.22
  region net 3V3: 702.44,255.22 707.44,250.22 707.44,222.22 702.44,217.22 656.44,217.22 650.44,211.22 650.44,174.22 647.44,171.22 611.44,171.22 608.44,174.22 608.44,226.22 586.44,248.22 586.44,291.22 576.44,301.22 533.44,301.22 501.44,333.22 469.44,333.22 469.44,345.22 460.94,353.72 481.44,374.22 524.44,374.22 527.44,371.22 527.44,330.22 540.44,317.22 582.44,317.22 602.44,297.22 602.44,261.22 608.44,255.22

## Silkscreen, mask and mechanical layers (free items; w line width, h text height)
Top Overlay:
  region: 153.44,401.22 153.44,389.22 165.44,389.22 165.44,383.22 153.44,383.22 153.44,371.22 147.44,371.22 147.44,383.22 135.44,383.22 135.44,389.22 147.44,389.22 147.44,401.22
  region: 153.44,101.22 153.44,71.22 147.44,71.22 147.44,101.22
  lines w6: 497.76,463.9 ccw(c515.44,446.22) 533.12,463.9
  lines w8: 140.44,360.22 132.44,352.22 38.44,352.22 28.44,362.22 28.44,410.22 38.44,420.22 132.44,420.22 140.44,412.22
  text "SD" at 137.44,306.22 h50 r270
  text "SC" at 137.44,206.22 h50 r270
  text "JLink ARM-OB" at 417.44,21.22 h55
Bottom Overlay:
  text "KitSprout" at 587.44,101.22 h100
  text "SWD" at 182.44,11.22 h80
Top Solder:
  region: 42.44,111.22 127.44,111.22 132.44,106.22 132.44,66.22 127.44,61.22 42.44,61.22 37.44,66.22 37.44,106.22
  region: 42.44,211.22 127.44,211.22 132.44,206.22 132.44,166.22 127.44,161.22 42.44,161.22 37.44,166.22 37.44,206.22
  region: 42.44,311.22 127.44,311.22 132.44,306.22 132.44,266.22 127.44,261.22 42.44,261.22 37.44,266.22 37.44,306.22
  region: 42.44,411.22 127.44,411.22 132.44,406.22 132.44,366.22 127.44,361.22 42.44,361.22 37.44,366.22 37.44,406.22
Mechanical 1:
  the board outline again, w2
Drill Drawing:
  text ".Legend" at 1032.65,10.22 h60

## Dimensions
0,458.78 to 944.88,458.78 on Mechanical 13
931.22,472.44 to 931.22,0 on Mechanical 13